# EAGLE board vfd_igbtdriver_mfg (EAGLE 9.2.2)
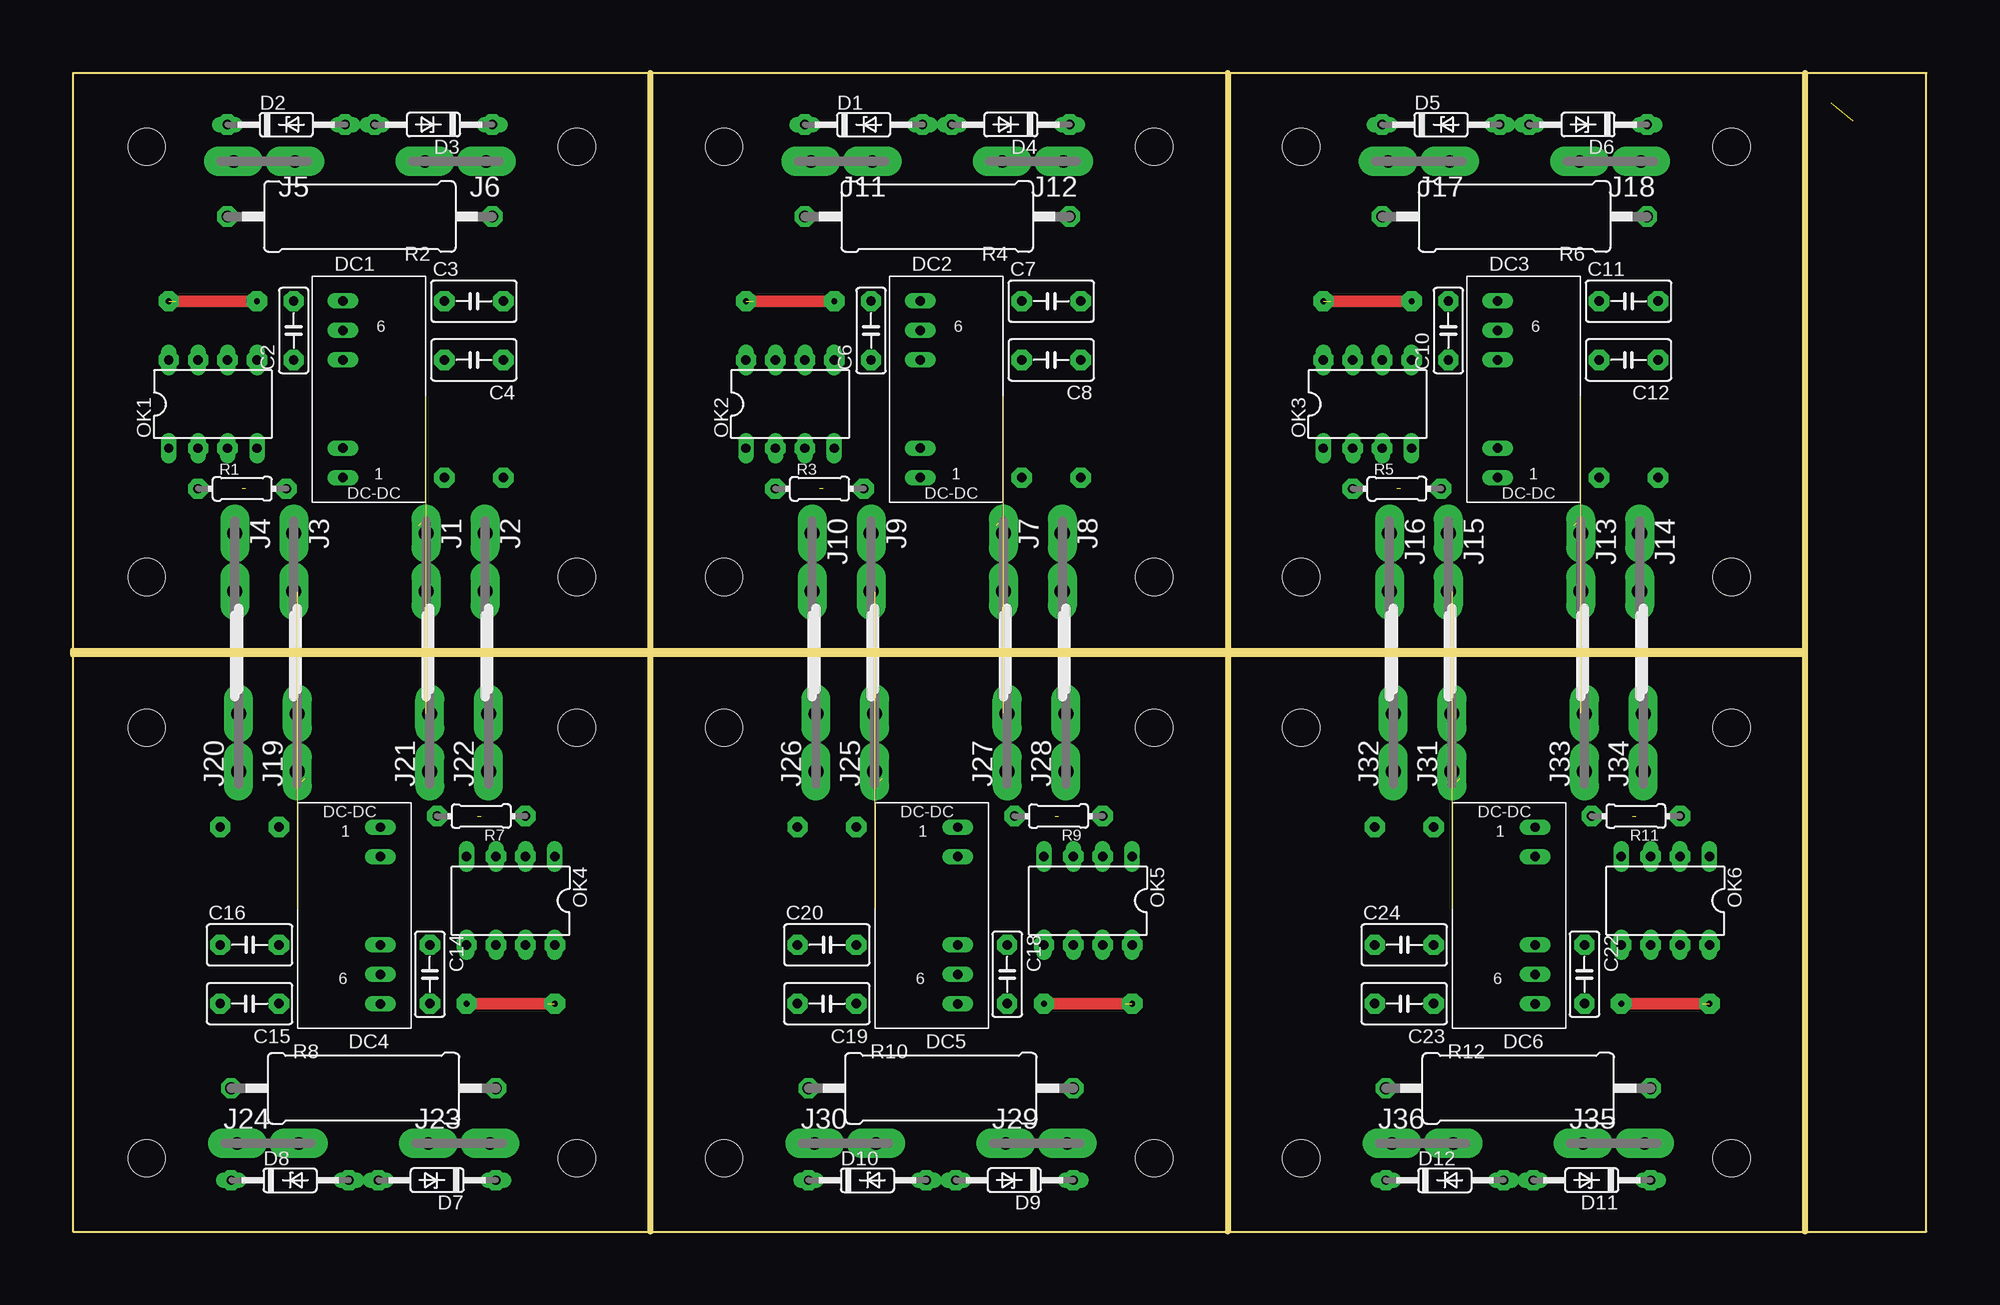
[diagram p0: board, top side]
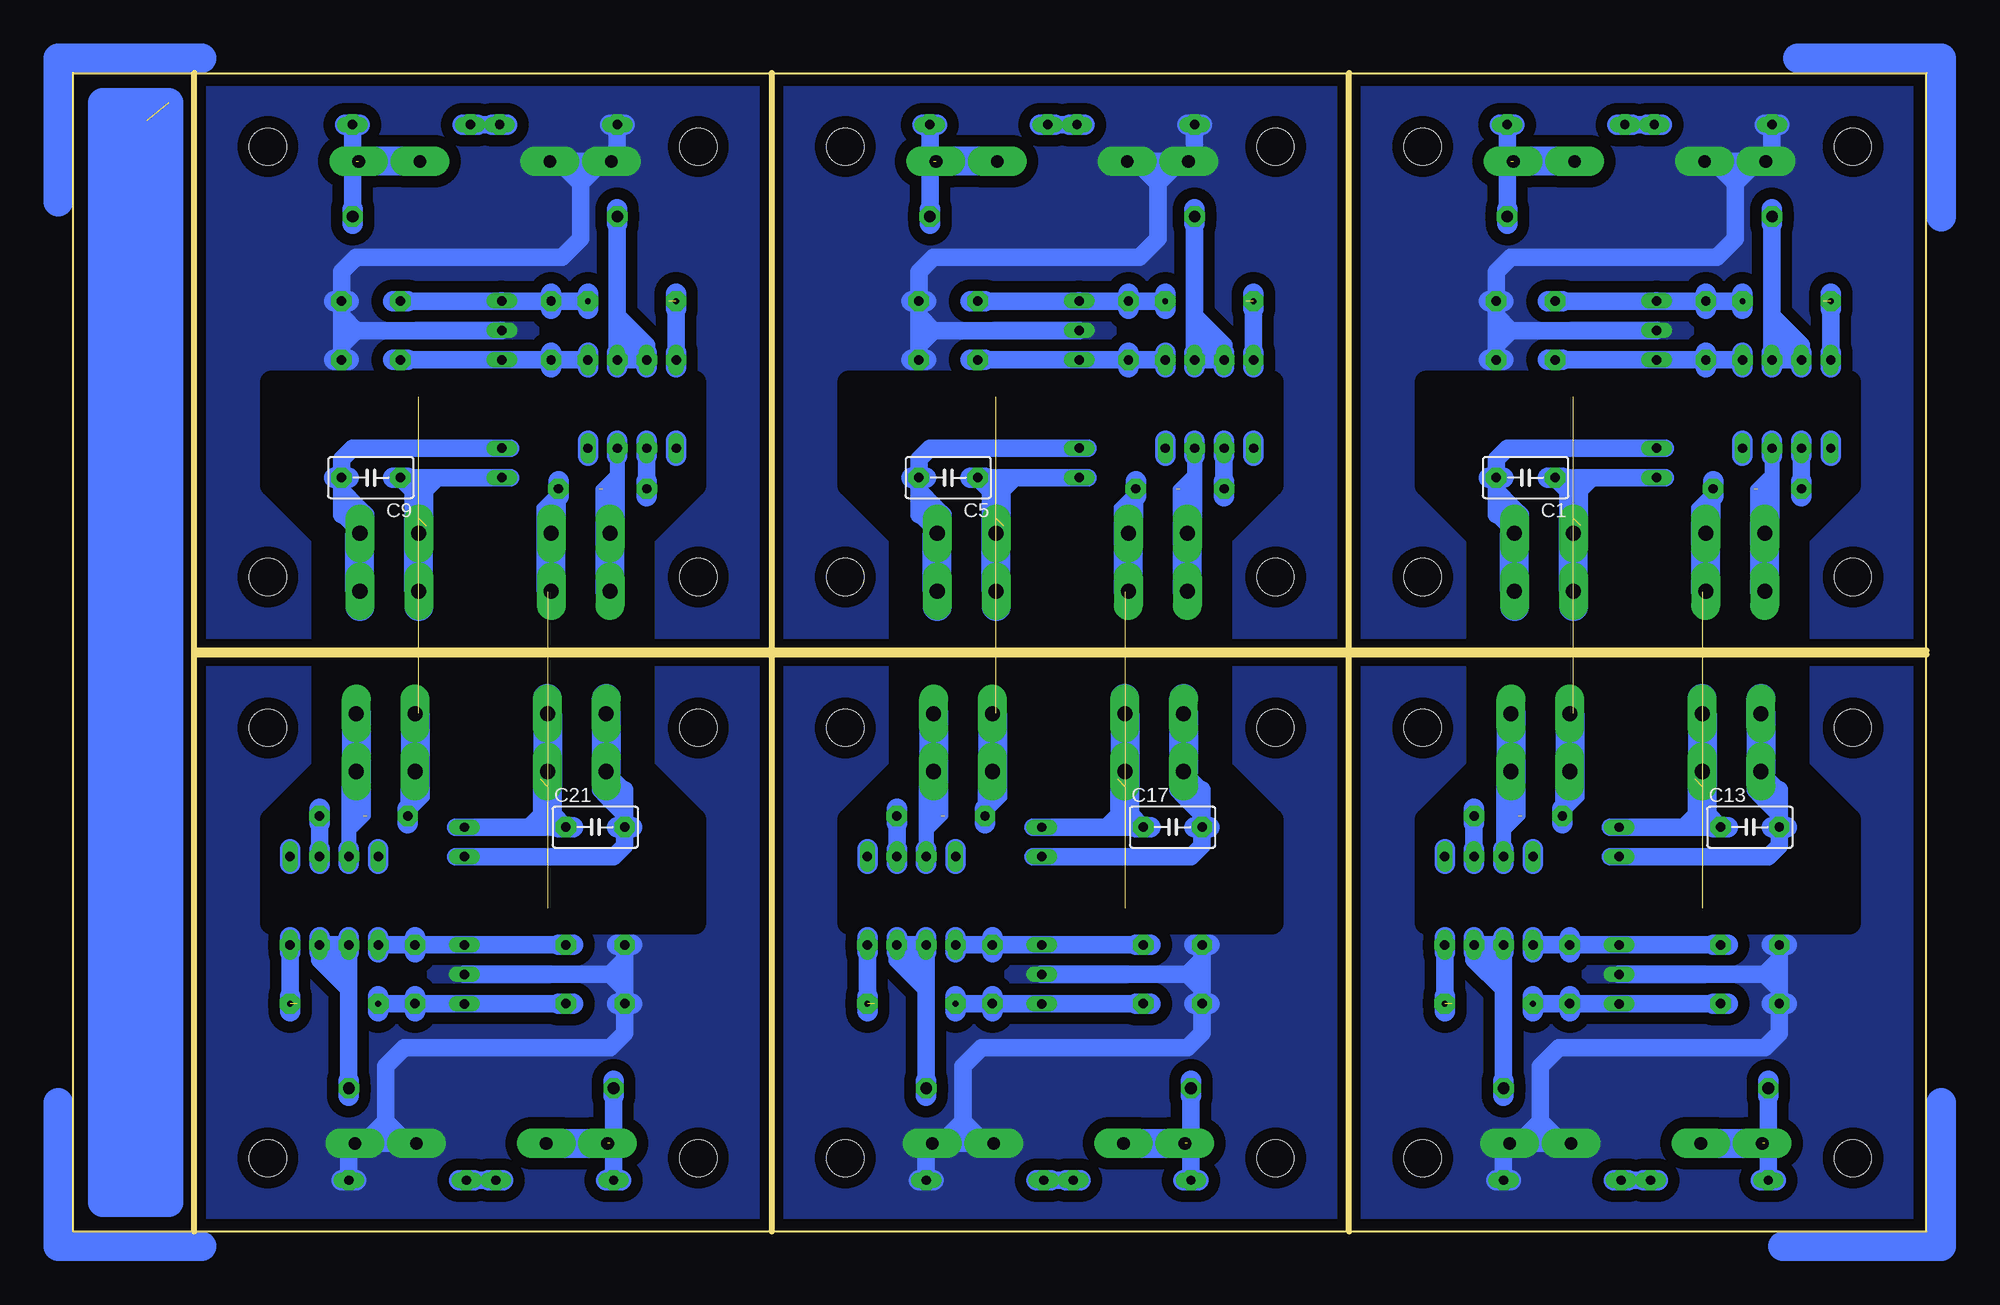
[diagram p1: board, bottom side, seen from below]

Size 160.02 x 100.01 mm. Coordinates in mm from the lower left corner, seen from the top.
Outline: 0,0 160,0
Outline: 0,0 0,100
Outline: 160.02,0 160.02,100.01 0,100.01
Outline: 49.85,50.16 0,50.16 0,100.01
Outline: 0,100.01 49.85,100.01
Outline: 49.85,50.16 99.69,50.16
Outline: 49.85,100.01 49.85,50.16
Outline: 49.85,100.01 99.69,100.01
Outline: 99.69,50.16 149.54,50.16 149.54,100.01 99.69,100.01
Outline: 99.69,100.01 99.69,50.16
Outline: 49.85,49.85 0,49.85 0,0
Outline: 49.85,0 0,0
Outline: 99.69,49.85 49.85,49.85
Outline: 99.69,0 49.85,0
Outline: 49.85,0 49.85,49.85
Outline: 99.69,49.85 149.54,49.85 149.54,0 99.69,0
Outline: 99.69,0 99.69,49.85
Copper layers (1*16): Top 0.035mm / dielectric 0.15mm / Bottom 0.035mm
Design rules "default": minimum track width 6mil, minimum drill 0.35mm, track to track 6mil, track to pad 6mil, pad to pad 6mil, via to via 6mil, smd to smd 6mil, copper to edge 40mil, drill to drill 6mil, minimum pad ring 10mil, minimum via ring 8mil, stop-mask expansion 4mil, vias tented up to drill 0mil, thermal gap 10mil
Holes 3.2 mm at 6.35,93.66 6.35,56.52 43.5,93.66 43.5,56.52 56.2,93.66 56.2,56.52 93.34,93.66 93.34,56.52 106.05,93.66 106.05,56.52 143.19,93.66 143.19,56.52 43.5,6.35 43.5,43.5 6.35,6.35 6.35,43.5 93.34,6.35 93.34,43.5 56.2,6.35 56.2,43.5 143.19,6.35 143.19,43.5 106.05,6.35 106.05,43.5
bRestrict: area 6.7,50.2 to 21,73.3; area 21,50.2 to 43.2,73.3; area 14.9,77.5 to 19,78.1; area 56.5,50.2 to 70.8,73.3; area 70.8,50.2 to 93,73.3; area 64.8,77.5 to 68.9,78.1; area 106.4,50.2 to 120.7,73.3; area 120.7,50.2 to 142.9,73.3; area 114.6,77.5 to 118.7,78.1; area 28.9,26.7 to 43.2,49.8; area 6.7,26.7 to 28.9,49.8; area 30.8,21.9 to 34.9,22.5; area 78.7,26.7 to 93,49.8; area 56.5,26.7 to 78.7,49.8; area 80.6,21.9 to 84.8,22.5; area 128.6,26.7 to 142.9,49.8; area 106.4,26.7 to 128.6,49.8; area 130.5,21.9 to 134.6,22.5
Milling: 14 lines

## Footprints (pad centres in the part's own frame; a part is rotated, then mirrored left to right if it is on the bottom)
C050-035X075 = drill 0.813 octagon: 1 -2.54,0; 2 2.54,0
C050-025X075 = drill 0.813 octagon: 1 -2.54,0; 2 2.54,0
DO35Z10 = drill 0.813 long: A 5.08,0; C -5.08,0
MGJ2 = drill 0.813 long: 1 -2.413,-6.756; 2 -2.413,-4.216; 5 -2.413,3.404; 6 -2.413,5.944; 7 -2.413,8.484
F061.200 = drill 1.3 pad 2.5 long: 1A -2.5,0; 1B 2.5,0
F061.040 = drill 1.1 pad 2.54 long: A1 -2.65,0; A2 2.65,0
DIL08 = drill 0.813 long: 1 -3.81,-3.81; 2 -1.27,-3.81; 3 1.27,-3.81; 4 3.81,-3.81; 5 3.81,3.81; 6 1.27,3.81; 7 -1.27,3.81; 8 -3.81,3.81
0204/7 = drill 0.813 octagon: 1 -3.81,0; 2 3.81,0
0617/22 = drill 1.016 octagon: 1 -11.43,0; 2 11.43,0

## Placement (x,y rotation side)
C1  0,47µ  [C050-035X075]  34.61,65.09 180 bottom
C2  100n  [C050-025X075]  19.05,77.79 90 top
C3  0,47µ  [C050-035X075]  34.61,80.33 0 top
C4  0,47µ  [C050-035X075]  34.61,75.25 180 top
C5  0,47µ  [C050-035X075]  84.45,65.09 180 bottom
C6  100n  [C050-025X075]  68.9,77.79 90 top
C7  0,47µ  [C050-035X075]  84.45,80.33 0 top
C8  0,47µ  [C050-035X075]  84.45,75.25 180 top
C9  0,47µ  [C050-035X075]  134.3,65.09 180 bottom
C10  100n  [C050-025X075]  118.75,77.79 90 top
C11  0,47µ  [C050-035X075]  134.3,80.33 0 top
C12  0,47µ  [C050-035X075]  134.3,75.25 180 top
C13  0,47µ  [C050-035X075]  15.24,34.92 0 bottom
C14  100n  [C050-025X075]  30.8,22.23 270 top
C15  0,47µ  [C050-035X075]  15.24,19.68 180 top
C16  0,47µ  [C050-035X075]  15.24,24.77 0 top
C17  0,47µ  [C050-035X075]  65.09,34.92 0 bottom
C18  100n  [C050-025X075]  80.64,22.23 270 top
C19  0,47µ  [C050-035X075]  65.09,19.68 180 top
C20  0,47µ  [C050-035X075]  65.09,24.77 0 top
C21  0,47µ  [C050-035X075]  114.94,34.92 0 bottom
C22  100n  [C050-025X075]  130.49,22.23 270 top
C23  0,47µ  [C050-035X075]  114.94,19.68 180 top
C24  0,47µ  [C050-035X075]  114.94,24.77 0 top
D1  ZD18  [DO35Z10]  68.26,95.57 0 top
D2  ZD18  [DO35Z10]  18.41,95.57 0 top
D3  ZD18  [DO35Z10]  31.11,95.57 180 top
D4  ZD18  [DO35Z10]  80.96,95.57 180 top
D5  ZD18  [DO35Z10]  118.11,95.57 0 top
D6  ZD18  [DO35Z10]  130.81,95.57 180 top
D7  ZD18  [DO35Z10]  31.43,4.45 180 top
D8  ZD18  [DO35Z10]  18.73,4.45 0 top
D9  ZD18  [DO35Z10]  81.28,4.45 180 top
D10  ZD18  [DO35Z10]  68.58,4.45 0 top
D11  ZD18  [DO35Z10]  131.13,4.45 180 top
D12  ZD18  [DO35Z10]  118.43,4.45 0 top
DC1  MGJ2D121505SC  [MGJ2]  25.72,71.86 0 top
DC2  MGJ2D121505SC  [MGJ2]  75.56,71.86 0 top
DC3  MGJ2D121505SC  [MGJ2]  125.41,71.86 0 top
DC4  MGJ2D121505SC  [MGJ2]  24.13,28.16 180 top
DC5  MGJ2D121505SC  [MGJ2]  73.98,28.16 180 top
DC6  MGJ2D121505SC  [MGJ2]  123.83,28.16 180 top
E$1  [A4L-LOC]  -47.62,-41.27 0 top  (outside the outline)
J1  FS-PW 2,8  [F061.200]  30.48,57.78 270 top
J2  FS-PW 2,8  [F061.200]  35.56,57.78 270 top
J3  FS-PW 2,8  [F061.200]  19.05,57.78 270 top
J4  FS-PW 2,8  [F061.200]  13.97,57.78 270 top
J5  FS-P 6,35  [F061.040]  16.51,92.39 180 top
J6  FS-P 6,35  [F061.040]  33.02,92.39 180 top
J7  FS-PW 2,8  [F061.200]  80.33,57.78 270 top
J8  FS-PW 2,8  [F061.200]  85.41,57.78 270 top
J9  FS-PW 2,8  [F061.200]  68.9,57.78 270 top
J10  FS-PW 2,8  [F061.200]  63.82,57.78 270 top
J11  FS-P 6,35  [F061.040]  66.36,92.39 180 top
J12  FS-P 6,35  [F061.040]  82.87,92.39 180 top
J13  FS-PW 2,8  [F061.200]  130.18,57.78 270 top
J14  FS-PW 2,8  [F061.200]  135.25,57.78 270 top
J15  FS-PW 2,8  [F061.200]  118.75,57.78 270 top
J16  FS-PW 2,8  [F061.200]  113.67,57.78 270 top
J17  FS-P 6,35  [F061.040]  116.2,92.39 180 top
J18  FS-P 6,35  [F061.040]  132.72,92.39 180 top
J19  FS-PW 2,8  [F061.200]  19.37,42.23 90 top
J20  FS-PW 2,8  [F061.200]  14.29,42.23 90 top
J21  FS-PW 2,8  [F061.200]  30.8,42.23 90 top
J22  FS-PW 2,8  [F061.200]  35.88,42.23 90 top
J23  FS-P 6,35  [F061.040]  33.34,7.62 0 top
J24  FS-P 6,35  [F061.040]  16.83,7.62 0 top
J25  FS-PW 2,8  [F061.200]  69.22,42.23 90 top
J26  FS-PW 2,8  [F061.200]  64.14,42.23 90 top
J27  FS-PW 2,8  [F061.200]  80.64,42.23 90 top
J28  FS-PW 2,8  [F061.200]  85.72,42.23 90 top
J29  FS-P 6,35  [F061.040]  83.19,7.62 0 top
J30  FS-P 6,35  [F061.040]  66.67,7.62 0 top
J31  FS-PW 2,8  [F061.200]  119.06,42.23 90 top
J32  FS-PW 2,8  [F061.200]  113.98,42.23 90 top
J33  FS-PW 2,8  [F061.200]  130.49,42.23 90 top
J34  FS-PW 2,8  [F061.200]  135.57,42.23 90 top
J35  FS-P 6,35  [F061.040]  133.03,7.62 0 top
J36  FS-P 6,35  [F061.040]  116.52,7.62 0 top
OK1  FOD3120V  [DIL08]  12.06,71.44 0 top
OK2  FOD3120V  [DIL08]  61.91,71.44 0 top
OK3  FOD3120V  [DIL08]  111.76,71.44 0 top
OK4  FOD3120V  [DIL08]  37.78,28.57 180 top
OK5  FOD3120V  [DIL08]  87.63,28.57 180 top
OK6  FOD3120V  [DIL08]  137.48,28.57 180 top
R1  140R  [0204/7]  14.61,64.14 0 top
R2  15R  [0617/22]  24.77,87.63 180 top
R3  140R  [0204/7]  64.45,64.14 0 top
R4  15R  [0617/22]  74.61,87.63 180 top
R5  140R  [0204/7]  114.3,64.14 0 top
R6  15R  [0617/22]  124.46,87.63 180 top
R7  140R  [0204/7]  35.24,35.88 180 top
R8  15R  [0617/22]  25.08,12.38 0 top
R9  140R  [0204/7]  85.09,35.88 180 top
R10  15R  [0617/22]  74.93,12.38 0 top
R11  140R  [0204/7]  134.94,35.88 180 top
R12  15R  [0617/22]  124.78,12.38 0 top

## Library data of the parts
C1-C24 R1-R12 = resistor
D1-D12 = diode
DC1-DC6 = custom; MF: C & D TECHNOLOGIES, INC; MPN: NMA0515SC; OC_FARNELL: 1021434; OC_NEWARK: 61K3064
E$1 = frames
J1-J36 = con-faston; OC_FARNELL: unknown; OC_NEWARK: unknown
OK1-OK6 = ic-package

## Nets
0V: C1.2 DC1.2 J2.1A J2.1B
0V1: C5.2 DC2.2 J8.1A J8.1B
0V2: C9.2 DC3.2 J14.1A J14.1B
0V3: C13.2 DC4.2 J20.1A J20.1B
0V4: C17.2 DC5.2 J26.1A J26.1B
0V5: C21.2 DC6.2 J32.1A J32.1B
+12V: C1.1 DC1.1 J1.1A J1.1B
+12V1: C5.1 DC2.1 J7.1A J7.1B
+12V2: C9.1 DC3.1 J13.1A J13.1B
+12V3: C13.1 DC4.1 J19.1A J19.1B
+12V4: C17.1 DC5.1 J25.1A J25.1B
+12V5: C21.1 DC6.1 J31.1A J31.1B
CTRL_5V: J3.1A J3.1B R1.2
CTRL_5V1: J9.1A J9.1B R3.2
CTRL_5V2: J15.1A J15.1B R5.2
CTRL_5V3: J21.1A J21.1B R7.2
CTRL_5V4: J27.1A J27.1B R9.2
CTRL_5V5: J33.1A J33.1B R11.2
CTRL_GND: J4.1A J4.1B OK1.3
CTRL_GND1: J10.1A J10.1B OK2.3
CTRL_GND2: J16.1A J16.1B OK3.3
CTRL_GND3: J22.1A J22.1B OK4.3
CTRL_GND4: J28.1A J28.1B OK5.3
CTRL_GND5: J34.1A J34.1B OK6.3
EMITTER: C3.2 C4.1 D2.C DC1.6 J5.A1 J5.A2
EMITTER1: C7.2 C8.1 D1.C DC2.6 J11.A1 J11.A2
EMITTER2: C11.2 C12.1 D5.C DC3.6 J17.A1 J17.A2
EMITTER3: C15.2 C16.1 D7.C DC4.6 J23.A1 J23.A2
EMITTER4: C19.2 C20.1 D9.C DC5.6 J29.A1 J29.A2
EMITTER5: C23.2 C24.1 D11.C DC6.6 J35.A1 J35.A2
GATE: D3.C J6.A1 J6.A2 R2.1
GATE1: D4.C J12.A1 J12.A2 R4.1
GATE2: D6.C J18.A1 J18.A2 R6.1
GATE3: D8.C J24.A1 J24.A2 R8.1
GATE4: D10.C J30.A1 J30.A2 R10.1
GATE5: D12.C J36.A1 J36.A2 R12.1
N$1: C2.1 C4.2 DC1.5 OK1.5
N$2: C2.2 C3.1 DC1.7 OK1.8
N$3: OK1.6 OK1.7 R2.2
N$4: OK1.2 R1.1
N$5: OK1.1
N$6: OK1.4
N$7: C6.1 C8.2 DC2.5 OK2.5
N$8: D2.A D3.A
N$9: C6.2 C7.1 DC2.7 OK2.8
N$10: OK2.6 OK2.7 R4.2
N$11: D1.A D4.A
N$12: OK2.2 R3.1
N$13: OK2.1
N$14: OK2.4
N$15: C10.1 C12.2 DC3.5 OK3.5
N$16: C10.2 C11.1 DC3.7 OK3.8
N$17: OK3.6 OK3.7 R6.2
N$18: D5.A D6.A
N$19: OK3.2 R5.1
N$20: OK3.1
N$21: OK3.4
N$22: C14.1 C16.2 DC4.5 OK4.5
N$23: C14.2 C15.1 DC4.7 OK4.8
N$24: OK4.6 OK4.7 R8.2
N$25: D7.A D8.A
N$26: OK4.2 R7.1
N$27: OK4.1
N$28: OK4.4
N$29: C18.1 C20.2 DC5.5 OK5.5
N$30: C18.2 C19.1 DC5.7 OK5.8
N$31: OK5.6 OK5.7 R10.2
N$32: D9.A D10.A
N$33: OK5.2 R9.1
N$34: OK5.1
N$35: OK5.4
N$36: C22.1 C24.2 DC6.5 OK6.5
N$37: C22.2 C23.1 DC6.7 OK6.8
N$38: OK6.6 OK6.7 R12.2
N$39: D11.A D12.A
N$40: OK6.2 R11.1
N$41: OK6.1
N$42: OK6.4

## Tracks (layer width: path | path; a pad name or v marks a point on that pad's centre or on a via)
0V  (via drill 0.5 pad 1.75)
  Bottom 1.25: 35.23,67.64 35.24,67.63 | 37.15,61.87 J2.1A | 35.56,62.55 37.15,64.14 C1.2 | J2.1A 35.56,62.55 | 35.56,62.55 34.92,61.91 34.92,60.01 | J2.1A 35.56,60.96 37.15,62.55
  Bottom 1.5: 35.23,67.64 DC1.2 22.55,67.64 22.54,67.63 | 35.24,67.63 36.2,67.63 37.15,66.67 C1.2 | 37.15,64.14 37.15,62.55 37.15,61.87
  Bottom 1.75: 36.51,65.09 C1.2 37.78,65.09
  Bottom 2.5: 35.56,53.98 J2.1B J2.1A
  other vias: 37.15,65.09
0V1  (via drill 0.5 pad 1.75)
  Bottom 1.25: 85.08,67.64 85.09,67.63 | 87,61.87 J8.1A | 85.41,62.55 87,64.14 C5.2 | J8.1A 85.41,62.55 | 85.41,62.55 84.77,61.91 84.77,60.01 | J8.1A 85.41,60.96 87,62.55
  Bottom 1.5: 85.08,67.64 DC2.2 72.4,67.64 72.39,67.63 | 85.09,67.63 86.04,67.63 87,66.67 C5.2 | 87,64.14 87,62.55 87,61.87
  Bottom 1.75: 86.36,65.09 C5.2 87.63,65.09
  Bottom 2.5: 85.41,53.98 J8.1B J8.1A
  other vias: 87,65.09
0V2  (via drill 0.5 pad 1.75)
  Bottom 1.25: 134.93,67.64 134.94,67.63 | 136.84,61.87 J14.1A | 135.25,62.55 136.84,64.14 C9.2 | J14.1A 135.25,62.55 | 135.25,62.55 134.62,61.91 134.62,60.01 | J14.1A 135.25,60.96 136.84,62.55
  Bottom 1.5: 134.93,67.64 DC3.2 122.25,67.64 122.24,67.63 | 134.94,67.63 135.89,67.63 136.84,66.67 C9.2 | 136.84,64.14 136.84,62.55 136.84,61.87
  Bottom 1.75: 136.21,65.09 C9.2 137.48,65.09
  Bottom 2.5: 135.25,53.98 J14.1B J14.1A
  other vias: 136.84,65.09
0V3  (via drill 0.5 pad 1.75)
  Bottom 1.25: 14.62,32.37 14.61,32.38 | 12.7,38.14 J20.1A | 14.29,37.47 12.7,35.88 C13.2 | J20.1A 14.29,37.47 | 14.29,37.47 14.92,38.1 14.92,40.01 | J20.1A 14.29,39.05 12.7,37.47
  Bottom 1.5: 14.62,32.37 DC4.2 27.29,32.37 27.3,32.38 | 14.61,32.38 13.65,32.38 12.7,33.34 C13.2 | 12.7,35.88 12.7,37.47 12.7,38.14
  Bottom 1.75: 13.34,34.92 C13.2 12.06,34.92
  Bottom 2.5: 14.29,46.04 J20.1B J20.1A
  other vias: 12.7,34.92
0V4  (via drill 0.5 pad 1.75)
  Bottom 1.25: 64.47,32.37 64.45,32.38 | 62.55,38.14 J26.1A | 64.14,37.47 62.55,35.88 C17.2 | J26.1A 64.14,37.47 | 64.14,37.47 64.77,38.1 64.77,40.01 | J26.1A 64.14,39.05 62.55,37.47
  Bottom 1.5: 64.47,32.37 DC5.2 77.14,32.37 77.15,32.38 | 64.45,32.38 63.5,32.38 62.55,33.34 C17.2 | 62.55,35.88 62.55,37.47 62.55,38.14
  Bottom 1.75: 63.18,34.92 C17.2 61.91,34.92
  Bottom 2.5: 64.14,46.04 J26.1B J26.1A
  other vias: 62.55,34.92
0V5  (via drill 0.5 pad 1.75)
  Bottom 1.25: 114.31,32.37 114.3,32.38 | 112.39,38.14 J32.1A | 113.98,37.47 112.39,35.88 C21.2 | J32.1A 113.98,37.47 | 113.98,37.47 114.62,38.1 114.62,40.01 | J32.1A 113.98,39.05 112.39,37.47
  Bottom 1.5: 114.31,32.37 DC6.2 126.99,32.37 127,32.38 | 114.3,32.38 113.35,32.38 112.39,33.34 C21.2 | 112.39,35.88 112.39,37.47 112.39,38.14
  Bottom 1.75: 113.03,34.92 C21.2 111.76,34.92
  Bottom 2.5: 113.98,46.04 J32.1B J32.1A
  other vias: 112.39,34.92
+12V  (via drill 0.5 pad 1.75)  (1 unrouted)
  Bottom 1.25: DC1.1 23.3,65.09 | 30.48,63.5 J1.1A 29.84,60.92 29.84,65.09
  Bottom 1.5: 23.3,65.09 28.89,65.09 | 28.89,65.09 29.84,65.09 31.43,65.09 | 30.96,63.98 30.48,63.5 28.89,65.09 | 30.96,63.98 C1.1 | J1.1A 30.96,60.76 30.96,63.98 | DC1.1 23.29,65.09 22.54,65.09
  Bottom 1.75: 32.7,65.09 C1.1 31.43,65.09
  Bottom 2.5: 30.48,53.98 J1.1B 30.48,61.59
  other vias: 32.07,65.09
+12V1  (via drill 0.5 pad 1.75)  (1 unrouted)
  Bottom 1.25: DC2.1 73.15,65.09 | 80.33,63.5 J7.1A 79.69,60.92 79.69,65.09
  Bottom 1.5: 73.15,65.09 78.74,65.09 | 78.74,65.09 79.69,65.09 81.28,65.09 | 80.8,63.98 80.33,63.5 78.74,65.09 | 80.8,63.98 v81.92,65.09 | J7.1A 80.8,60.76 80.8,63.98 | DC2.1 73.14,65.09 72.39,65.09
  Bottom 1.75: 82.55,65.09 v81.92,65.09 81.28,65.09
  Bottom 2.5: 80.33,53.98 J7.1B 80.33,61.59
+12V2  (via drill 0.5 pad 1.75)  (1 unrouted)
  Bottom 1.25: DC3.1 123,65.09 | 130.18,63.5 J13.1A 129.54,60.92 129.54,65.09
  Bottom 1.5: 123,65.09 128.59,65.09 | 128.59,65.09 129.54,65.09 131.13,65.09 | 130.65,63.98 130.18,63.5 128.59,65.09 | 130.65,63.98 C9.1 | J13.1A 130.65,60.76 130.65,63.98 | DC3.1 122.99,65.09 122.24,65.09
  Bottom 1.75: 132.4,65.09 C9.1 131.13,65.09
  Bottom 2.5: 130.18,53.98 J13.1B 130.18,61.59
  other vias: 131.76,65.09
+12V3  (via drill 0.5 pad 1.75)  (1 unrouted)
  Bottom 1.25: DC4.1 26.54,34.92 | 19.37,36.51 J19.1A 20,39.09 20,34.92
  Bottom 1.5: 26.54,34.92 20.95,34.92 | 20.95,34.92 20,34.92 18.41,34.92 | 18.89,36.04 19.37,36.51 20.95,34.92 | 18.89,36.04 C13.1 | J19.1A 18.89,39.25 18.89,36.04 | DC4.1 26.56,34.92 27.3,34.92
  Bottom 1.75: 17.14,34.92 C13.1 18.41,34.92
  Bottom 2.5: 19.37,46.04 J19.1B 19.37,38.42
  other vias: 17.78,34.92
+12V4  (via drill 0.5 pad 1.75)  (1 unrouted)
  Bottom 1.25: DC5.1 76.39,34.92 | 69.22,36.51 J25.1A 69.85,39.09 69.85,34.92
  Bottom 1.5: 76.39,34.92 70.8,34.92 | 70.8,34.92 69.85,34.92 68.26,34.92 | 68.74,36.04 69.22,36.51 70.8,34.92 | 68.74,36.04 C17.1 | J25.1A 68.74,39.25 68.74,36.04 | DC5.1 76.4,34.92 77.15,34.92
  Bottom 1.75: 66.99,34.92 C17.1 68.26,34.92
  Bottom 2.5: 69.22,46.04 J25.1B 69.22,38.42
  other vias: 67.63,34.92
+12V5  (via drill 0.5 pad 1.75)  (1 unrouted)
  Bottom 1.25: DC6.1 126.24,34.92 | 119.06,36.51 J31.1A 119.7,39.09 119.7,34.92
  Bottom 1.5: 126.24,34.92 120.65,34.92 | 120.65,34.92 119.7,34.92 118.11,34.92 | 118.59,36.04 119.06,36.51 120.65,34.92 | 118.59,36.04 v117.47,34.92 | J31.1A 118.59,39.25 118.59,36.04 | DC6.1 126.25,34.92 127,34.92
  Bottom 1.75: 116.84,34.92 v117.47,34.92 118.11,34.92
  Bottom 2.5: 119.06,46.04 J31.1B 119.06,38.42
CTRL_5V  (via drill 0.5 pad 1.75)
  Bottom 0.635: R1.2 18.1,63.82 18.1,60.01 | R1.2 19.37,63.18 | 19.37,63.18 20,62.55 20,60.33 19.37,60.33 | 19.37,60.33 19.05,60.33 18.73,60.33 18.73,63.82 R1.2 | 19.37,60.33 19.37,63.18
  Bottom 1.5: 19.05,60.33 J3.1A J3.1B
  Bottom 1.75: 18.41,64.77 R1.2 18.41,63.5
  Bottom 2.5: 19.05,55.24 19.05,60.33 19.05,60.64
  other vias: 18.41,64.14
CTRL_5V1  (via drill 0.5 pad 1.75)
  Bottom 0.635: R3.2 67.94,63.82 67.94,60.01 | R3.2 69.22,63.18 | 69.22,63.18 69.85,62.55 69.85,60.33 69.22,60.33 | 69.22,60.33 68.9,60.33 68.58,60.33 68.58,63.82 R3.2 | 69.22,60.33 69.22,63.18
  Bottom 1.5: 68.9,60.33 J9.1A J9.1B
  Bottom 1.75: 68.26,64.77 R3.2 68.26,63.5
  Bottom 2.5: 68.9,55.24 68.9,60.33 68.9,60.64
  other vias: 68.26,64.14
CTRL_5V2  (via drill 0.5 pad 1.75)
  Bottom 0.635: R5.2 117.79,63.82 117.79,60.01 | R5.2 119.06,63.18 | 119.06,63.18 119.7,62.55 119.7,60.33 119.06,60.33 | 119.06,60.33 118.75,60.33 118.43,60.33 118.43,63.82 R5.2 | 119.06,60.33 119.06,63.18
  Bottom 1.5: 118.75,60.33 J15.1A J15.1B
  Bottom 1.75: 118.11,64.77 R5.2 118.11,63.5
  Bottom 2.5: 118.75,55.24 118.75,60.33 118.75,60.64
  other vias: 118.11,64.14
CTRL_5V3  (via drill 0.5 pad 1.75)
  Bottom 0.635: R7.2 31.75,36.2 31.75,40.01 | R7.2 30.48,36.83 | 30.48,36.83 29.84,37.47 29.84,39.69 30.48,39.69 | 30.48,39.69 30.8,39.69 31.11,39.69 31.11,36.2 R7.2 | 30.48,39.69 30.48,36.83
  Bottom 1.5: 30.8,39.69 J21.1A J21.1B
  Bottom 1.75: 31.43,35.24 R7.2 31.43,36.51
  Bottom 2.5: 30.8,44.77 30.8,39.69 30.8,39.37
  other vias: 31.43,35.88
CTRL_5V4  (via drill 0.5 pad 1.75)
  Bottom 0.635: R9.2 81.6,36.2 81.6,40.01 | R9.2 80.33,36.83 | 80.33,36.83 79.69,37.47 79.69,39.69 80.33,39.69 | 80.33,39.69 80.64,39.69 80.96,39.69 80.96,36.2 R9.2 | 80.33,39.69 80.33,36.83
  Bottom 1.5: 80.64,39.69 J27.1A J27.1B
  Bottom 1.75: 81.28,35.24 R9.2 81.28,36.51
  Bottom 2.5: 80.64,44.77 80.64,39.69 80.64,39.37
  other vias: 81.28,35.88
CTRL_5V5  (via drill 0.5 pad 1.75)
  Bottom 0.635: R11.2 131.44,36.2 131.44,40.01 | R11.2 130.18,36.83 | 130.18,36.83 129.54,37.47 129.54,39.69 130.18,39.69 | 130.18,39.69 130.49,39.69 130.81,39.69 130.81,36.2 R11.2 | 130.18,39.69 130.18,36.83
  Bottom 1.5: 130.49,39.69 J33.1A J33.1B
  Bottom 1.75: 131.13,35.24 R11.2 131.13,36.51
  Bottom 2.5: 130.49,44.77 130.49,39.69 130.49,39.37
  other vias: 131.13,35.88
CTRL_GND  (via drill 0.5 pad 1.75)  (1 unrouted)
  Bottom 0.635: 13.34,60.33 13.02,60.33 13.02,67.31 v13.34,67.63 | 13.65,65.41 14.92,64.14 14.92,60.33 13.97,60.33 13.34,60.33 | 13.65,65.41 13.65,67.31 | 13.65,64.45 13.65,65.09 | 13.65,65.41 13.65,65.09 | 13.65,65.09 14.29,64.45 | 13.34,61.59 14.61,61.59 14.61,64.14 13.97,64.14 13.97,61.91 | 13.34,66.99 13.34,60.33
  Bottom 1.5: 13.97,60.33 J4.1A J4.1B
  Bottom 1.75: 13.34,68.26 v13.34,67.63 13.34,66.99
  Bottom 2.5: 13.97,55.24 13.97,60.33
CTRL_GND1  (via drill 0.5 pad 1.75)  (1 unrouted)
  Bottom 0.635: 63.18,60.33 62.87,60.33 62.87,67.31 OK2.3 | 63.5,65.41 64.77,64.14 64.77,60.33 63.82,60.33 63.18,60.33 | 63.5,65.41 63.5,67.31 | 63.5,64.45 63.5,65.09 | 63.5,65.41 63.5,65.09 | 63.5,65.09 64.14,64.45 | 63.18,61.59 64.45,61.59 64.45,64.14 63.82,64.14 63.82,61.91 | 63.18,66.99 63.18,60.33
  Bottom 1.5: 63.82,60.33 J10.1A J10.1B
  Bottom 1.75: 63.18,68.26 OK2.3 63.18,66.99
  Bottom 2.5: 63.82,55.24 63.82,60.33
  other vias: 63.18,67.63
CTRL_GND2  (via drill 0.5 pad 1.75)  (1 unrouted)
  Bottom 0.635: 113.03,60.33 112.71,60.33 112.71,67.31 OK3.3 | 113.35,65.41 114.62,64.14 114.62,60.33 113.67,60.33 113.03,60.33 | 113.35,65.41 113.35,67.31 | 113.35,64.45 113.35,65.09 | 113.35,65.41 113.35,65.09 | 113.35,65.09 113.98,64.45 | 113.03,61.59 114.3,61.59 114.3,64.14 113.67,64.14 113.67,61.91 | 113.03,66.99 113.03,60.33
  Bottom 1.5: 113.67,60.33 J16.1A J16.1B
  Bottom 1.75: 113.03,68.26 OK3.3 113.03,66.99
  Bottom 2.5: 113.67,55.24 113.67,60.33
  other vias: 113.03,67.63
CTRL_GND3  (via drill 0.5 pad 1.75)  (1 unrouted)
  Bottom 0.635: 36.51,39.69 36.83,39.69 36.83,32.7 OK4.3 | 36.2,34.61 34.92,35.88 34.92,39.69 35.88,39.69 36.51,39.69 | 36.2,34.61 36.2,32.7 | 36.2,35.56 36.2,34.92 | 36.2,34.61 36.2,34.92 | 36.2,34.92 35.56,35.56 | 36.51,38.42 35.24,38.42 35.24,35.88 35.88,35.88 35.88,38.1 | 36.51,33.02 36.51,39.69
  Bottom 1.5: 35.88,39.69 J22.1A J22.1B
  Bottom 1.75: 36.51,31.75 OK4.3 36.51,33.02
  Bottom 2.5: 35.88,44.77 35.88,39.69
  other vias: 36.51,32.38
CTRL_GND4  (via drill 0.5 pad 1.75)  (1 unrouted)
  Bottom 0.635: 86.36,39.69 86.68,39.69 86.68,32.7 OK5.3 | 86.04,34.61 84.77,35.88 84.77,39.69 85.72,39.69 86.36,39.69 | 86.04,34.61 86.04,32.7 | 86.04,35.56 86.04,34.92 | 86.04,34.61 86.04,34.92 | 86.04,34.92 85.41,35.56 | 86.36,38.42 85.09,38.42 85.09,35.88 85.72,35.88 85.72,38.1 | 86.36,33.02 86.36,39.69
  Bottom 1.5: 85.72,39.69 J28.1A J28.1B
  Bottom 1.75: 86.36,31.75 OK5.3 86.36,33.02
  Bottom 2.5: 85.72,44.77 85.72,39.69
  other vias: 86.36,32.38
CTRL_GND5  (via drill 0.5 pad 1.75)  (1 unrouted)
  Bottom 0.635: 136.21,39.69 136.53,39.69 136.53,32.7 OK6.3 | 135.89,34.61 134.62,35.88 134.62,39.69 135.57,39.69 136.21,39.69 | 135.89,34.61 135.89,32.7 | 135.89,35.56 135.89,34.92 | 135.89,34.61 135.89,34.92 | 135.89,34.92 135.25,35.56 | 136.21,38.42 134.94,38.42 134.94,35.88 135.57,35.88 135.57,38.1 | 136.21,33.02 136.21,39.69
  Bottom 1.5: 135.57,39.69 J34.1A J34.1B
  Bottom 1.75: 136.21,31.75 OK6.3 136.21,33.02
  Bottom 2.5: 135.57,44.77 135.57,39.69
  other vias: 136.21,32.38
EMITTER  (via drill 0.5 pad 1.75)
  Bottom 1.5: 14.61,92.39 16.51,92.39 | 16.51,92.39 J5.A1 | v13.34,95.57 13.34,92.92 J5.A2 14.61,92.39 | 16.51,90.49 16.51,85.72 18.1,84.14 35.88,84.14 37.15,82.87 C3.2 37.15,79.06 | 16.51,90.49 16.51,92.39 | 14.61,92.39 16.51,90.49 | 16.51,90.49 18.41,92.39 19.37,92.39 | DC1.6 23.32,77.79 35.88,77.79 | 37.15,79.06 37.15,76.52 | 37.15,76.52 C4.1 | 35.88,77.79 37.15,76.52 | 35.88,77.79 37.15,79.06
  Bottom 1.75: 12.7,95.57 v13.34,95.57 13.97,95.57 | 36.51,80.33 C3.2 37.78,80.33 | 36.51,75.25 C4.1 37.78,75.25
  other vias: 37.15,75.25 37.15,80.33
  pour Bottom (isolate 1, no thermals): 0,50.16 0,100.01 49.85,100.01 49.85,50.16
EMITTER1  (via drill 0.5 pad 1.75)
  Bottom 1.5: 64.45,92.39 66.36,92.39 | 66.36,92.39 J11.A1 | D1.C 63.18,92.92 J11.A2 64.45,92.39 | 66.36,90.49 66.36,85.72 67.94,84.14 85.72,84.14 87,82.87 C7.2 87,79.06 | 66.36,90.49 66.36,92.39 | 64.45,92.39 66.36,90.49 | 66.36,90.49 68.26,92.39 69.22,92.39 | DC2.6 73.17,77.79 85.72,77.79 | 87,79.06 87,76.52 | 87,76.52 C8.1 | 85.72,77.79 87,76.52 | 85.72,77.79 87,79.06
  Bottom 1.75: 62.55,95.57 D1.C 63.82,95.57 | 86.36,80.33 C7.2 87.63,80.33 | 86.36,75.25 C8.1 87.63,75.25
  other vias: 87,75.25 87,80.33 63.18,95.57
  pour Bottom (isolate 1, no thermals): 49.85,50.16 49.85,100.01 99.69,100.01 99.69,50.16
EMITTER2  (via drill 0.5 pad 1.75)
  Bottom 1.5: 114.3,92.39 116.2,92.39 | 116.2,92.39 J17.A1 | D5.C 113.03,92.92 J17.A2 114.3,92.39 | 116.2,90.49 116.2,85.72 117.79,84.14 135.57,84.14 136.84,82.87 C11.2 136.84,79.06 | 116.2,90.49 116.2,92.39 | 114.3,92.39 116.2,90.49 | 116.2,90.49 118.11,92.39 119.06,92.39 | DC3.6 123.01,77.79 135.57,77.79 | 136.84,79.06 136.84,76.52 | 136.84,76.52 C12.1 | 135.57,77.79 136.84,76.52 | 135.57,77.79 136.84,79.06
  Bottom 1.75: 112.39,95.57 D5.C 113.67,95.57 | 136.21,80.33 C11.2 137.48,80.33 | 136.21,75.25 C12.1 137.48,75.25
  other vias: 136.84,75.25 136.84,80.33 113.03,95.57
  pour Bottom (isolate 1, no thermals): 99.69,50.16 99.69,100.01 149.54,100.01 149.54,50.16
EMITTER3  (via drill 0.5 pad 1.75)
  Bottom 1.5: 35.24,7.62 33.34,7.62 | 33.34,7.62 J23.A1 | D7.C 36.51,7.09 J23.A2 35.24,7.62 | 33.34,9.53 33.34,14.29 31.75,15.88 13.97,15.88 12.7,17.14 C15.2 12.7,20.95 | 33.34,9.53 33.34,7.62 | 35.24,7.62 33.34,9.53 | 33.34,9.53 31.43,7.62 30.48,7.62 | DC4.6 26.53,22.23 13.97,22.23 | 12.7,20.95 12.7,23.5 | 12.7,23.5 C16.1 | 13.97,22.23 12.7,23.5 | 13.97,22.23 12.7,20.95
  Bottom 1.75: 37.15,4.45 D7.C 35.88,4.45 | 13.34,19.68 C15.2 12.06,19.68 | 13.34,24.77 C16.1 12.06,24.77
  other vias: 12.7,24.77 12.7,19.68 36.51,4.45
  pour Bottom (isolate 1, no thermals): 49.85,49.85 49.85,0 0,0 0,49.85
EMITTER4  (via drill 0.5 pad 1.75)
  Bottom 1.5: 85.09,7.62 83.19,7.62 | 83.19,7.62 J29.A1 | D9.C 86.36,7.09 J29.A2 85.09,7.62 | 83.19,9.53 83.19,14.29 81.6,15.88 63.82,15.88 62.55,17.14 C19.2 62.55,20.95 | 83.19,9.53 83.19,7.62 | 85.09,7.62 83.19,9.53 | 83.19,9.53 81.28,7.62 80.33,7.62 | DC5.6 76.38,22.23 63.82,22.23 | 62.55,20.95 62.55,23.5 | 62.55,23.5 C20.1 | 63.82,22.23 62.55,23.5 | 63.82,22.23 62.55,20.95
  Bottom 1.75: 87,4.45 D9.C 85.72,4.45 | 63.18,19.68 C19.2 61.91,19.68 | 63.18,24.77 C20.1 61.91,24.77
  other vias: 62.55,24.77 62.55,19.68 86.36,4.45
  pour Bottom (isolate 1, no thermals): 99.69,49.85 99.69,0 49.85,0 49.85,49.85
EMITTER5  (via drill 0.5 pad 1.75)
  Bottom 1.5: 134.94,7.62 133.03,7.62 | 133.03,7.62 J35.A1 | D11.C 136.21,7.09 J35.A2 134.94,7.62 | 133.03,9.53 133.03,14.29 131.44,15.88 113.67,15.88 112.39,17.14 C23.2 112.39,20.95 | 133.03,9.53 133.03,7.62 | 134.94,7.62 133.03,9.53 | 133.03,9.53 131.13,7.62 130.18,7.62 | DC6.6 126.22,22.23 113.67,22.23 | 112.39,20.95 112.39,23.5 | 112.39,23.5 C24.1 | 113.67,22.23 112.39,23.5 | 113.67,22.23 112.39,20.95
  Bottom 1.75: 136.84,4.45 D11.C 135.57,4.45 | 113.03,19.68 C23.2 111.76,19.68 | 113.03,24.77 C24.1 111.76,24.77
  other vias: 112.39,24.77 112.39,19.68 136.21,4.45
  pour Bottom (isolate 1, no thermals): 149.54,49.85 149.54,0 99.69,0 99.69,49.85
GATE  (via drill 0.5 pad 1.75)  (1 unrouted)
  Bottom 1.5: D3.C 36.2,92.39 | 36.2,92.39 36.2,88.27 | J6.A2 30.48,92.39 | 35.88,92.39 36.2,92.39
  Bottom 1.75: 36.2,88.27 R2.1 36.2,87 | 35.56,95.57 D3.C 36.83,95.57
  Bottom 2.5: 30.48,92.39 35.88,92.39
  other vias: 36.2,87.63 36.2,95.57
GATE1  (via drill 0.5 pad 1.75)  (1 unrouted)
  Bottom 1.5: D4.C 86.04,92.39 | 86.04,92.39 86.04,88.27 | J12.A2 80.33,92.39 | 85.72,92.39 86.04,92.39
  Bottom 1.75: 86.04,88.27 R4.1 86.04,87 | 85.41,95.57 D4.C 86.68,95.57
  Bottom 2.5: 80.33,92.39 85.72,92.39
  other vias: 86.04,87.63 86.04,95.57
GATE2  (via drill 0.5 pad 1.75)  (1 unrouted)
  Bottom 1.5: D6.C 135.89,92.39 | 135.89,92.39 135.89,88.27 | J18.A2 130.18,92.39 | 135.57,92.39 135.89,92.39
  Bottom 1.75: 135.89,88.27 R6.1 135.89,87 | 135.25,95.57 D6.C 136.53,95.57
  Bottom 2.5: 130.18,92.39 135.57,92.39
  other vias: 135.89,87.63 135.89,95.57
GATE3  (via drill 0.5 pad 1.75)  (1 unrouted)
  Bottom 1.5: D8.C 13.65,7.62 | 13.65,7.62 13.65,11.75 | J24.A2 19.37,7.62 | 13.97,7.62 13.65,7.62
  Bottom 1.75: 13.65,11.75 R8.1 13.65,13.02 | 14.29,4.45 D8.C 13.02,4.45
  Bottom 2.5: 19.37,7.62 13.97,7.62
  other vias: 13.65,12.38 13.65,4.45
GATE4  (via drill 0.5 pad 1.75)  (1 unrouted)
  Bottom 1.5: D10.C 63.5,7.62 | 63.5,7.62 63.5,11.75 | J30.A2 69.22,7.62 | 63.82,7.62 63.5,7.62
  Bottom 1.75: 63.5,11.75 R10.1 63.5,13.02 | 64.14,4.45 D10.C 62.87,4.45
  Bottom 2.5: 69.22,7.62 63.82,7.62
  other vias: 63.5,12.38 63.5,4.45
GATE5  (via drill 0.5 pad 1.75)  (1 unrouted)
  Bottom 1.5: D12.C 113.35,7.62 | 113.35,7.62 113.35,11.75 | J36.A2 119.06,7.62 | 113.67,7.62 113.35,7.62
  Bottom 1.75: 113.35,11.75 R12.1 113.35,13.02 | 113.98,4.45 D12.C 112.71,4.45
  Bottom 2.5: 119.06,7.62 113.67,7.62
  other vias: 113.35,12.38 113.35,4.45
N$1  (via drill 0.5 pad 1.75)
  Bottom 1.5: OK1.5 C2.1 19.06,75.26 DC1.5 31.43,75.26
  Bottom 1.75: 15.88,75.88 OK1.5 15.88,74.61 | 19.05,75.88 C2.1 19.05,74.61 | 32.7,75.25 C4.2 31.45,75.25 31.43,75.26
  other vias: 32.07,75.25 15.88,75.25 19.05,75.25
N$2  (via drill 0.5 pad 1.75)  (1 unrouted)
  Top 1: 8.89,80.33 v15.88,80.33
  Bottom 1.5: v15.88,80.33 C2.2 23.32,80.33 | 8.26,75.88 8.26,79.69 | 23.32,80.33 DC1.7 | 31.43,80.33 23.32,80.33
  Bottom 1.75: 8.26,79.69 v8.26,80.33 8.26,80.96 | 8.26,75.88 v8.26,75.25 8.26,74.61 | 19.05,79.69 C2.2 19.05,80.96 | 15.88,79.69 v15.88,80.33 15.88,80.96 | 31.43,80.33 C3.1 32.7,80.33
  other vias: 32.07,80.33 19.05,80.33
N$3  (via drill 0.5 pad 1.75)
  Bottom 1.5: 13.34,87 13.34,79.06 | 13.34,79.06 10.79,76.52 10.79,75.88 | 13.34,75.88 13.34,76.83 | 13.34,76.83 13.34,79.06 | v13.34,75.25 OK1.7 12.38,76.83 13.34,76.83
  Bottom 1.75: 10.79,75.88 OK1.7 10.79,74.61 | 13.34,75.88 v13.34,75.25 13.34,74.61 | 13.34,88.27 R2.2 13.34,87
  other vias: 10.79,75.25 13.34,87.63
N$4  (via drill 0.5 pad 1.75)
  Bottom 1.5: 10.79,66.99 10.79,64.77
  Bottom 1.75: 10.79,68.26 OK1.2 10.79,66.99 | 10.79,64.77 R1.1 10.79,63.5
  other vias: 10.79,67.63 10.79,64.14
N$5
  Bottom 1.75: 8.26,68.26 OK1.1 8.26,66.99
N$6
  Bottom 1.75: 15.88,68.26 OK1.4 15.88,66.99
N$7  (via drill 0.5 pad 1.75)
  Bottom 1.5: OK2.5 C6.1 DC2.5 81.28,75.26
  Bottom 1.75: 65.72,75.88 OK2.5 65.72,74.61 | 68.9,75.88 C6.1 68.9,74.61 | 82.55,75.25 v81.92,75.25 81.29,75.25 81.28,75.26
  other vias: 65.72,75.25 68.9,75.25
N$8  (via drill 0.5 pad 1.75)
  Bottom 1.5: 24.13,95.57 25.4,95.57
  Bottom 1.75: 22.86,95.57 v23.5,95.57 24.13,95.57 | 25.4,95.57 v26.04,95.57 26.67,95.57
N$9  (via drill 0.5 pad 1.75)  (1 unrouted)
  Top 1: 58.74,80.33 v65.72,80.33
  Bottom 1.5: v65.72,80.33 C6.2 73.17,80.33 | 58.1,75.88 58.1,79.69 | 73.17,80.33 DC2.7 | 81.28,80.33 73.17,80.33
  Bottom 1.75: 58.1,79.69 v58.1,80.33 58.1,80.96 | 58.1,75.88 OK2.8 58.1,74.61 | 68.9,79.69 C6.2 68.9,80.96 | 65.72,79.69 v65.72,80.33 65.72,80.96 | 81.28,80.33 v81.92,80.33 82.55,80.33
  other vias: 58.1,75.25 68.9,80.33
N$10  (via drill 0.5 pad 1.75)
  Bottom 1.5: 63.18,87 63.18,79.06 | 63.18,79.06 60.64,76.52 60.64,75.88 | 63.18,75.88 63.18,76.83 | 63.18,76.83 63.18,79.06 | OK2.6 OK2.7 62.23,76.83 63.18,76.83
  Bottom 1.75: 60.64,75.88 OK2.7 60.64,74.61 | 63.18,75.88 OK2.6 63.18,74.61 | 63.18,88.27 R4.2 63.18,87
  other vias: 60.64,75.25 63.18,75.25 63.18,87.63
N$11  (via drill 0.5 pad 1.75)
  Bottom 1.5: 73.98,95.57 75.25,95.57
  Bottom 1.75: 72.71,95.57 D1.A 73.98,95.57 | 75.25,95.57 D4.A 76.52,95.57
  other vias: 73.34,95.57 75.88,95.57
N$12  (via drill 0.5 pad 1.75)
  Bottom 1.5: 60.64,66.99 60.64,64.77
  Bottom 1.75: 60.64,68.26 OK2.2 60.64,66.99 | 60.64,64.77 R3.1 60.64,63.5
  other vias: 60.64,67.63 60.64,64.14
N$13
  Bottom 1.75: 58.1,68.26 OK2.1 58.1,66.99
N$14
  Bottom 1.75: 65.72,68.26 OK2.4 65.72,66.99
N$15  (via drill 0.5 pad 1.75)
  Bottom 1.5: OK3.5 C10.1 DC3.5 131.13,75.26
  Bottom 1.75: 115.57,75.88 OK3.5 115.57,74.61 | 118.75,75.88 C10.1 118.75,74.61 | 132.4,75.25 C12.2 131.14,75.25 131.13,75.26
  other vias: 131.76,75.25 115.57,75.25 118.75,75.25
N$16  (via drill 0.5 pad 1.75)  (1 unrouted)
  Top 1: 108.58,80.33 v115.57,80.33
  Bottom 1.5: v115.57,80.33 C10.2 123.01,80.33 | 107.95,75.88 107.95,79.69 | 123.01,80.33 DC3.7 | 131.13,80.33 123.01,80.33
  Bottom 1.75: 107.95,79.69 v107.95,80.33 107.95,80.96 | 107.95,75.88 OK3.8 107.95,74.61 | 118.75,79.69 C10.2 118.75,80.96 | 115.57,79.69 v115.57,80.33 115.57,80.96 | 131.13,80.33 C11.1 132.4,80.33
  other vias: 131.76,80.33 107.95,75.25 118.75,80.33
N$17  (via drill 0.5 pad 1.75)
  Bottom 1.5: 113.03,87 113.03,79.06 | 113.03,79.06 110.49,76.52 110.49,75.88 | 113.03,75.88 113.03,76.83 | 113.03,76.83 113.03,79.06 | OK3.6 OK3.7 112.08,76.83 113.03,76.83
  Bottom 1.75: 110.49,75.88 OK3.7 110.49,74.61 | 113.03,75.88 OK3.6 113.03,74.61 | 113.03,88.27 R6.2 113.03,87
  other vias: 110.49,75.25 113.03,75.25 113.03,87.63
N$18  (via drill 0.5 pad 1.75)
  Bottom 1.5: 123.83,95.57 125.09,95.57
  Bottom 1.75: 122.56,95.57 D5.A 123.83,95.57 | 125.09,95.57 D6.A 126.36,95.57
  other vias: 123.19,95.57 125.73,95.57
N$19  (via drill 0.5 pad 1.75)
  Bottom 1.5: 110.49,66.99 110.49,64.77
  Bottom 1.75: 110.49,68.26 OK3.2 110.49,66.99 | 110.49,64.77 R5.1 110.49,63.5
  other vias: 110.49,67.63 110.49,64.14
N$20
  Bottom 1.75: 107.95,68.26 OK3.1 107.95,66.99
N$21
  Bottom 1.75: 115.57,68.26 OK3.4 115.57,66.99
N$22  (via drill 0.5 pad 1.75)
  Bottom 1.5: OK4.5 C14.1 30.79,24.75 DC4.5 18.41,24.75
  Bottom 1.75: 33.97,24.13 OK4.5 33.97,25.4 | 30.8,24.13 C14.1 30.8,25.4 | 17.14,24.77 C16.2 18.4,24.77 18.41,24.75
  other vias: 17.78,24.77 33.97,24.77 30.8,24.77
N$23  (via drill 0.5 pad 1.75)  (1 unrouted)
  Top 1: 40.96,19.68 v33.97,19.68
  Bottom 1.5: v33.97,19.68 v30.8,19.68 26.53,19.68 | 41.59,24.13 41.59,20.32 | 26.53,19.68 DC4.7 | 18.41,19.68 26.53,19.68
  Bottom 1.75: 41.59,20.32 v41.59,19.68 41.59,19.05 | 41.59,24.13 OK4.8 41.59,25.4 | 30.8,20.32 v30.8,19.68 30.8,19.05 | 33.97,20.32 v33.97,19.68 33.97,19.05 | 18.41,19.68 C15.1 17.14,19.68
  other vias: 17.78,19.68 41.59,24.77
N$24  (via drill 0.5 pad 1.75)
  Bottom 1.5: 36.51,13.02 36.51,20.95 | 36.51,20.95 39.05,23.5 39.05,24.13 | 36.51,24.13 36.51,23.18 | 36.51,23.18 36.51,20.95 | OK4.6 OK4.7 37.47,23.18 36.51,23.18
  Bottom 1.75: 39.05,24.13 OK4.7 39.05,25.4 | 36.51,24.13 OK4.6 36.51,25.4 | 36.51,11.75 R8.2 36.51,13.02
  other vias: 39.05,24.77 36.51,24.77 36.51,12.38
N$25  (via drill 0.5 pad 1.75)
  Bottom 1.5: 25.72,4.45 24.45,4.45
  Bottom 1.75: 26.99,4.45 D7.A 25.72,4.45 | 24.45,4.45 D8.A 23.18,4.45
  other vias: 26.35,4.45 23.81,4.45
N$26  (via drill 0.5 pad 1.75)
  Bottom 1.5: 39.05,33.02 39.05,35.24
  Bottom 1.75: 39.05,31.75 OK4.2 39.05,33.02 | 39.05,35.24 R7.1 39.05,36.51
  other vias: 39.05,32.38 39.05,35.88
N$27
  Bottom 1.75: 41.59,31.75 OK4.1 41.59,33.02
N$28
  Bottom 1.75: 33.97,31.75 OK4.4 33.97,33.02
N$29  (via drill 0.5 pad 1.75)
  Bottom 1.5: OK5.5 C18.1 80.63,24.75 DC5.5 68.26,24.75
  Bottom 1.75: 83.82,24.13 OK5.5 83.82,25.4 | 80.64,24.13 C18.1 80.64,25.4 | 66.99,24.77 C20.2 68.25,24.77 68.26,24.75
  other vias: 67.63,24.77 83.82,24.77 80.64,24.77
N$30  (via drill 0.5 pad 1.75)  (1 unrouted)
  Top 1: 90.81,19.68 v83.82,19.68
  Bottom 1.5: v83.82,19.68 v80.64,19.68 76.38,19.68 | 91.44,24.13 91.44,20.32 | 76.38,19.68 DC5.7 | 68.26,19.68 76.38,19.68
  Bottom 1.75: 91.44,20.32 v91.44,19.68 91.44,19.05 | 91.44,24.13 OK5.8 91.44,25.4 | 80.64,20.32 v80.64,19.68 80.64,19.05 | 83.82,20.32 v83.82,19.68 83.82,19.05 | 68.26,19.68 C19.1 66.99,19.68
  other vias: 67.63,19.68 91.44,24.77
N$31  (via drill 0.5 pad 1.75)
  Bottom 1.5: 86.36,13.02 86.36,20.95 | 86.36,20.95 88.9,23.5 88.9,24.13 | 86.36,24.13 86.36,23.18 | 86.36,23.18 86.36,20.95 | OK5.6 OK5.7 87.31,23.18 86.36,23.18
  Bottom 1.75: 88.9,24.13 OK5.7 88.9,25.4 | 86.36,24.13 OK5.6 86.36,25.4 | 86.36,11.75 R10.2 86.36,13.02
  other vias: 88.9,24.77 86.36,24.77 86.36,12.38
N$32  (via drill 0.5 pad 1.75)
  Bottom 1.5: 75.56,4.45 74.3,4.45
  Bottom 1.75: 76.83,4.45 D9.A 75.56,4.45 | 74.3,4.45 D10.A 73.03,4.45
  other vias: 76.2,4.45 73.66,4.45
N$33  (via drill 0.5 pad 1.75)
  Bottom 1.5: 88.9,33.02 88.9,35.24
  Bottom 1.75: 88.9,31.75 OK5.2 88.9,33.02 | 88.9,35.24 R9.1 88.9,36.51
  other vias: 88.9,32.38 88.9,35.88
N$34
  Bottom 1.75: 91.44,31.75 OK5.1 91.44,33.02
N$35
  Bottom 1.75: 83.82,31.75 OK5.4 83.82,33.02
N$36  (via drill 0.5 pad 1.75)
  Bottom 1.5: OK6.5 C22.1 130.48,24.75 DC6.5 118.11,24.75
  Bottom 1.75: 133.67,24.13 OK6.5 133.67,25.4 | 130.49,24.13 C22.1 130.49,25.4 | 116.84,24.77 v117.47,24.77 118.1,24.77 118.11,24.75
  other vias: 133.67,24.77 130.49,24.77
N$37  (via drill 0.5 pad 1.75)  (1 unrouted)
  Top 1: 140.65,19.68 v133.67,19.68
  Bottom 1.5: v133.67,19.68 v130.49,19.68 126.22,19.68 | 141.29,24.13 141.29,20.32 | 126.22,19.68 DC6.7 | 118.11,19.68 126.22,19.68
  Bottom 1.75: 141.29,20.32 v141.29,19.68 141.29,19.05 | 141.29,24.13 OK6.8 141.29,25.4 | 130.49,20.32 v130.49,19.68 130.49,19.05 | 133.67,20.32 v133.67,19.68 133.67,19.05 | 118.11,19.68 v117.47,19.68 116.84,19.68
  other vias: 141.29,24.77
N$38  (via drill 0.5 pad 1.75)
  Bottom 1.5: 136.21,13.02 136.21,20.95 | 136.21,20.95 138.75,23.5 138.75,24.13 | 136.21,24.13 136.21,23.18 | 136.21,23.18 136.21,20.95 | OK6.6 OK6.7 137.16,23.18 136.21,23.18
  Bottom 1.75: 138.75,24.13 OK6.7 138.75,25.4 | 136.21,24.13 OK6.6 136.21,25.4 | 136.21,11.75 R12.2 136.21,13.02
  other vias: 138.75,24.77 136.21,24.77 136.21,12.38
N$39  (via drill 0.5 pad 1.75)
  Bottom 1.5: 125.41,4.45 124.14,4.45
  Bottom 1.75: 126.68,4.45 D11.A 125.41,4.45 | 124.14,4.45 D12.A 122.87,4.45
  other vias: 126.05,4.45 123.51,4.45
N$40  (via drill 0.5 pad 1.75)
  Bottom 1.5: 138.75,33.02 138.75,35.24
  Bottom 1.75: 138.75,31.75 OK6.2 138.75,33.02 | 138.75,35.24 R11.1 138.75,36.51
  other vias: 138.75,32.38 138.75,35.88
N$41
  Bottom 1.75: 141.29,31.75 OK6.1 141.29,33.02
N$42
  Bottom 1.75: 133.67,31.75 OK6.4 133.67,33.02
S$1
  Bottom 2.54: -1.27,87.63 -1.27,101.28 11.11,101.28
S$2  (1 unrouted)
  Bottom 2.54: 153.67,95.57 153.67,4.45 155.57,4.45 155.57,95.89 153.67,95.89 | 151.76,97.47 151.76,2.54 157.48,2.54 157.48,97.47 151.76,97.47
S$4
  Bottom 2.54: 148.91,101.28 161.29,101.28 161.29,88.9
S$5
  Bottom 2.54: -1.27,11.11 -1.27,-1.27 12.38,-1.27
S$6
  Bottom 2.54: 148.91,-1.27 161.29,-1.27 161.29,11.11
(copper drawn outside any net)
  shapes: Bottom circle x24

## Text on the board
Document: Variable Frequency Drive | IGBT-Driver | (C) 2019 Christoph Klie | Version 1.0 | [1/1]